# EAGLE board panelized (EAGLE 8.4.3)
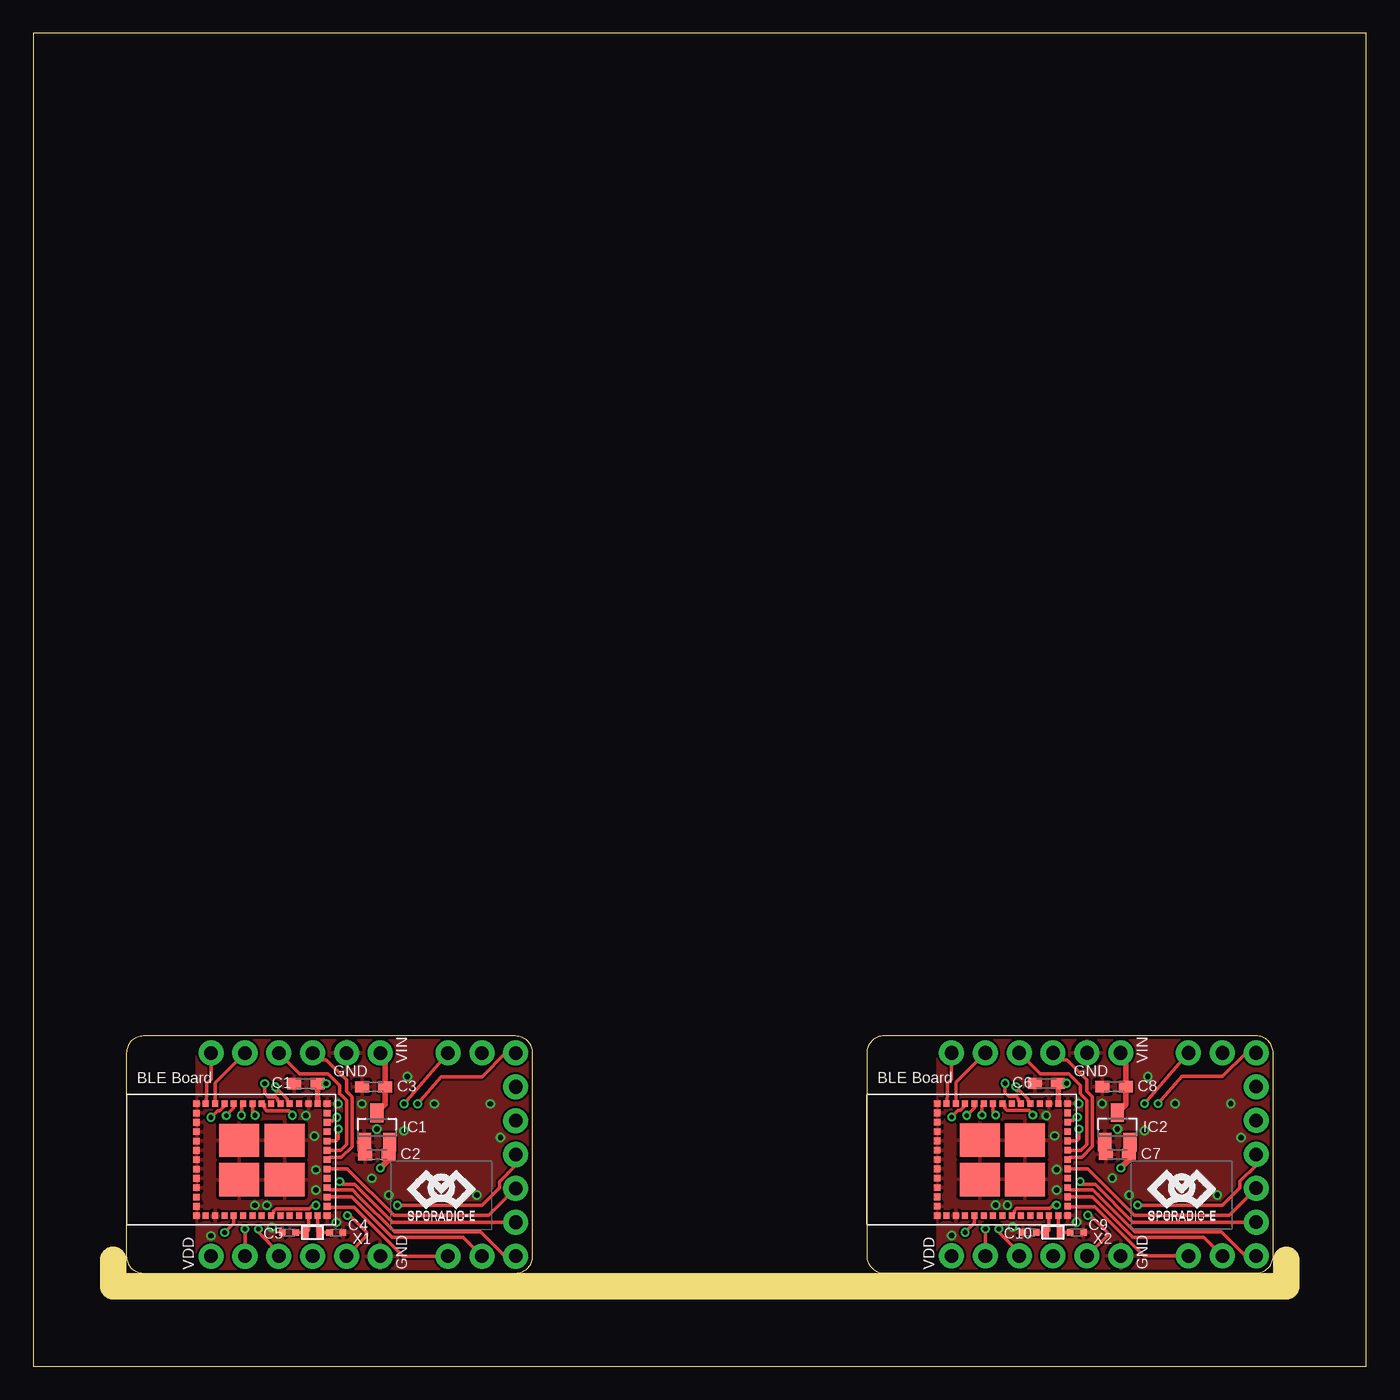
[diagram p0: board, top side]
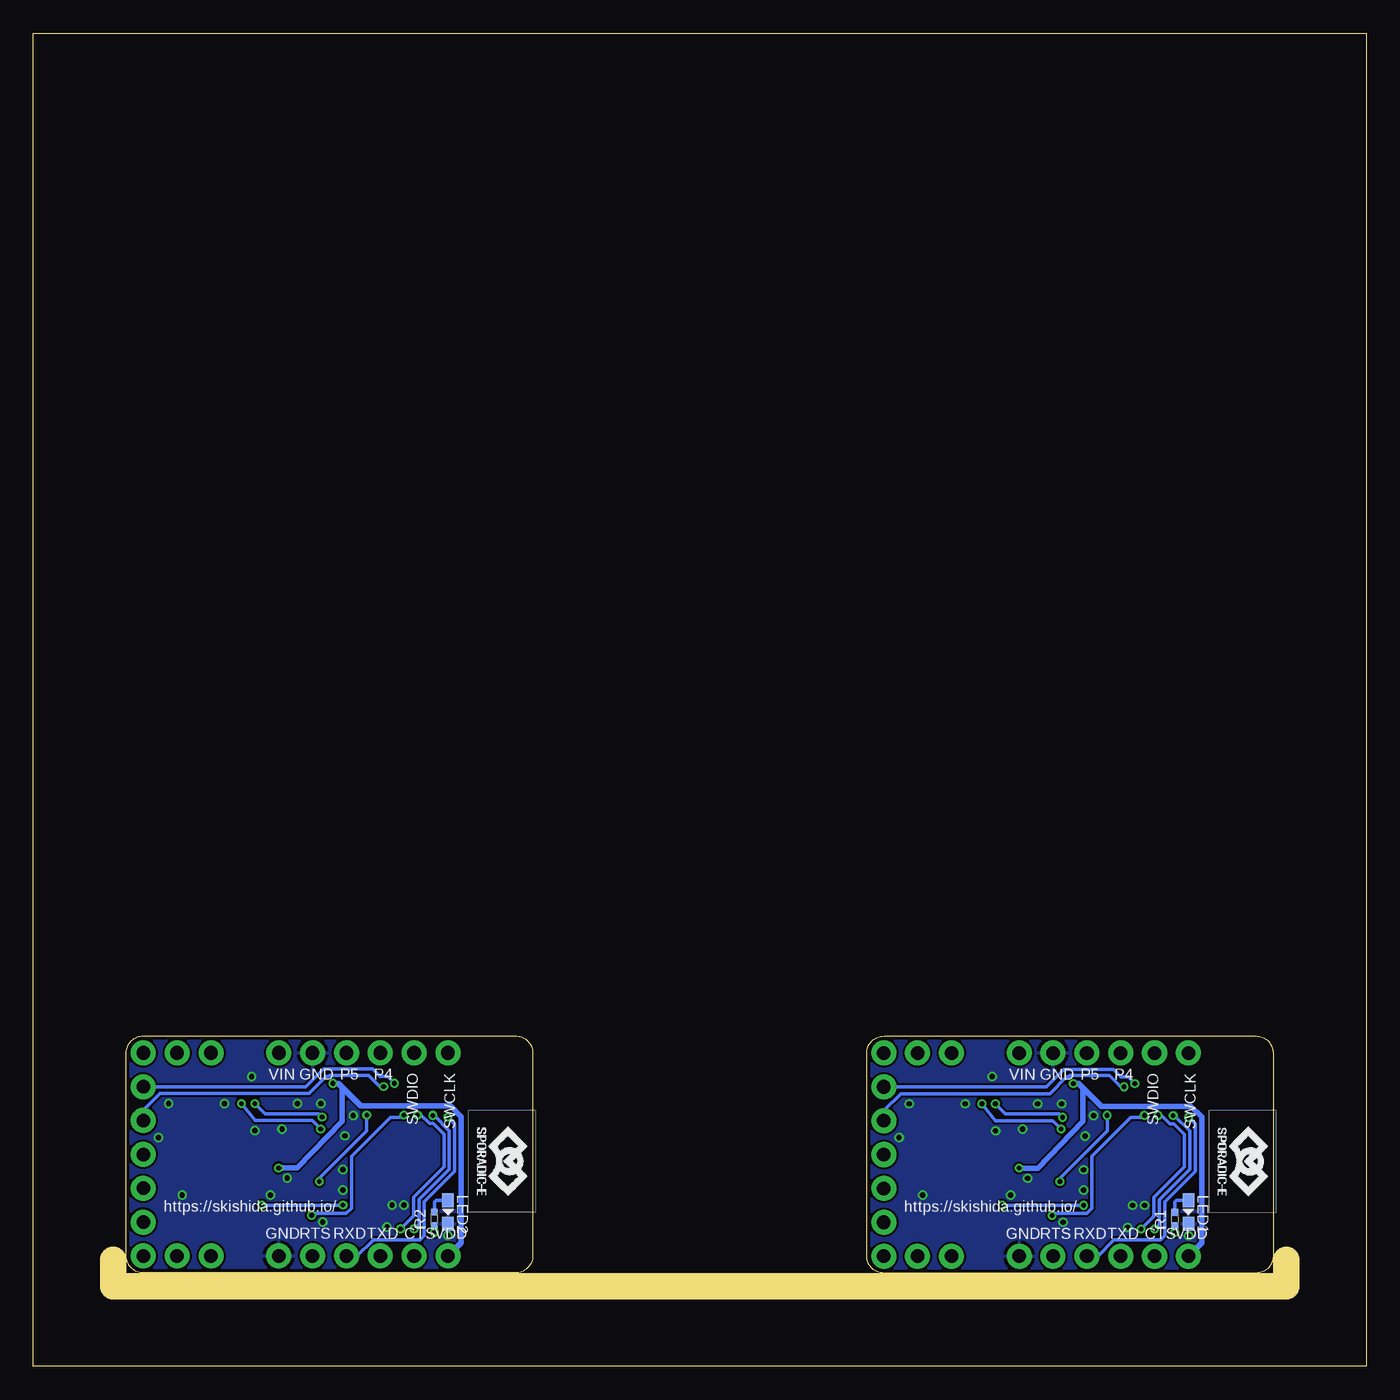
[diagram p1: board, bottom side, seen from below]

Size 100 x 100 mm. Coordinates in mm from the lower left corner, seen from the top.
Outline: 0,0 100,0 100,100 0,100 0,0
Outline: 36.2,24.77 8.26,24.77 arc90 6.99,23.5 6.99,8.26 arc90 8.26,6.99 36.2,6.99 arc90 37.47,8.26 37.47,23.5 arc90 36.2,24.77
Outline: 91.75,24.78 63.81,24.78 arc90 62.54,23.51 62.54,8.27 arc90 63.81,7 91.75,7 arc90 93.02,8.27 93.02,23.51 arc90 91.75,24.78
Copper layers (1*16): Top 0.035mm / dielectric 1.5mm / Bottom 0.035mm
Design rules "SeeedStudio_2layer_DRU_no_angle_20140221": minimum track width 6mil, minimum drill 12mil, track to track 6mil, track to pad 6mil, pad to pad 6mil, via to via 6mil, smd to smd 0mil, copper to edge 10mil, drill to drill 10mil, minimum pad ring 10mil, minimum via ring 6mil, stop-mask expansion 2mil, vias tented up to drill 25mil, thermal gap 10mil
Milling: 3 lines

## Footprints (pad centres in the part's own frame; a part is rotated, then mirrored left to right if it is on the bottom)
SMD1608_REDUCED = smd 1.05 x 0.85: 1 -0.875,0; 2 0.875,0
SMD1005 = smd 0.5 x 0.5: 1 -0.5,0; 2 0.5,0
SOT23 = smd 1 x 1.4: 1 -0.95,-1.1; 2 0.95,-1.1; 3 0,1.1
1X06_NO_SILK = drill 1.016 pad 1.88: 1 0,0; 2 2.54,0; 3 5.08,0; 4 7.62,0; 5 10.16,0; 6 12.7,0
1X03_NO_SILK = drill 1.016 pad 1.88: 1 0,0; 2 2.54,0; 3 5.08,0
1X05_NO_SILK = drill 1.016 pad 1.88: 1 0,0; 2 2.54,0; 3 5.08,0; 4 7.62,0; 5 10.16,0
LED1608_REDUCED = smd 1.05 x 0.85: A -0.875,0; K 0.875,0
MBH7BLZ02 = smd 0.5 x 0.5: P$1 -4.9,-4.2; P$15 4.9,-4.2; P$16 4.9,-3.5; P$17 4.9,-2.8; P$18 4.9,-2.1; P$19 4.9,-1.4; P$20 4.9,-0.7; P$21 4.9,0; P$22 4.9,0.7; P$23 4.9,1.4; P$24 4.9,2.1; P$25 4.9,2.8; P$26 4.9,3.5; P$27 4.9,4.2; P$41 -4.9,4.2; P$42 -4.9,3.5; P$43 -4.9,2.8; P$44 -4.9,2.1; P$45 -4.9,1.4; P$46 -4.9,0.7; P$47 -4.9,0; P$48 -4.9,-0.7; P$49 -4.9,-1.4; P$50 -4.9,-2.1; P$51 -4.9,-2.8; P$52 -4.9,-3.5 | smd 0.45 x 0.5: P$2 -4.2,-4.2; P$3 -3.5,-4.2; P$4 -2.8,-4.2; P$5 -2.1,-4.2; P$6 -1.4,-4.2; P$7 -0.7,-4.2; P$8 0,-4.2; P$9 0.7,-4.2; P$10 1.4,-4.2; P$11 2.1,-4.2; P$12 2.8,-4.2; P$13 3.5,-4.2; P$14 4.2,-4.2; P$28 4.2,4.2; P$29 3.5,4.2; P$30 2.8,4.2; P$31 2.1,4.2; P$32 1.4,4.2; P$33 0.7,4.2; P$34 0,4.2; P$35 -0.7,4.2; P$36 -1.4,4.2; P$37 -2.1,4.2; P$38 -2.8,4.2; P$39 -3.5,4.2; P$40 -4.2,4.2 | smd 3 x 2.5: P$53 -1.7,1.45; P$54 -1.7,-1.5; P$55 1.7,-1.5; P$56 1.7,1.45
SMD1610 = smd 0.5 x 1: 1 -0.55,-0.01; 2 0.55,-0.01

## Placement (x,y rotation side)
C1  1u  [SMD1608_REDUCED]  20.45,21.21 180 top
C2  [SMD1608_REDUCED]  25.78,15.88 180 top
C3  [SMD1608_REDUCED]  25.53,20.95 180 top
C4  [SMD1005]  22.73,10.03 0 top
C5  [SMD1005]  19.18,10.03 0 top
C6  1u  [SMD1608_REDUCED]  76,21.22 180 top
C7  [SMD1608_REDUCED]  81.34,15.89 180 top
C8  [SMD1608_REDUCED]  81.08,20.97 180 top
C9  [SMD1005]  78.29,10.05 0 top
C10  [SMD1005]  74.73,10.05 0 top
IC1  MCP1703CB  [SOT23]  25.78,17.91 0 top
IC2  MCP1703CB  [SOT23]  81.34,17.92 0 top
J1  [1X06_NO_SILK]  13.34,23.5 0 top
J2  [1X06_NO_SILK]  13.34,8.26 0 top
J3  [1X03_NO_SILK]  31.11,23.5 0 top
J4  [1X03_NO_SILK]  31.11,8.26 0 top
J5  [1X05_NO_SILK]  36.2,10.79 90 top
J6  [1X06_NO_SILK]  68.89,23.51 0 top
J7  [1X06_NO_SILK]  68.89,8.27 0 top
J8  [1X03_NO_SILK]  86.67,23.51 0 top
J9  [1X03_NO_SILK]  86.67,8.27 0 top
J10  [1X05_NO_SILK]  91.75,10.81 90 top
LED1  [LED1608_REDUCED]  13.34,11.56 270 bottom
LED2  [LED1608_REDUCED]  68.89,11.57 270 bottom
R1  [SMD1005]  14.35,11.05 270 bottom
R2  [SMD1005]  69.91,11.06 270 bottom
U$1  MBH7BLZ02  [MBH7BLZ02]  17.14,15.49 0 top
U$2  [LOGO-20MM]  30.61,12.83 0 top
U$3  [LOGO-20MM]  9.27,15.37 270 bottom
U$4  MBH7BLZ02  [MBH7BLZ02]  72.7,15.51 0 top
U$5  [LOGO-20MM]  86.16,12.84 0 top
U$6  [LOGO-20MM]  64.83,15.38 270 bottom
X1  ABS05-32.768KHZ-9-T  [SMD1610]  20.95,10.03 180 top
X2  ABS05-32.768KHZ-9-T  [SMD1610]  76.51,10.05 180 top

## Library data of the parts
C1-C10 LED1 LED2 R1 R2 = generic
IC1 IC2 = linear
J1 J2 J6 J7 = SparkFun-Connectors; PROD_ID: CONN-08437
J3-J5 J8-J10 = SparkFun-Connectors
U$1 U$4 = MBH7BLZ02
U$2 U$3 U$5 U$6 = logo
X1 X2 = SparkFun-Electromechanical

## Nets
CTS: J2.2 U$1.P$37
CTS1: J7.2 U$4.P$37
GND: C1.2 C2.2 C3.2 C4.2 C5.1 IC1.1 J1.5 J2.6 LED1.K U$1.P$1 U$1.P$3 U$1.P$15 U$1.P$27 U$1.P$29 U$1.P$41 U$1.P$42 U$1.P$43 U$1.P$44 U$1.P$45 U$1.P$46 U$1.P$47 U$1.P$48 U$1.P$49 U$1.P$50 U$1.P$52 U$1.P$53 U$1.P$54 U$1.P$55 U$1.P$56
GND1: C6.2 C7.2 C8.2 C9.2 C10.1 IC2.1 J6.5 J7.6 LED2.K U$4.P$1 U$4.P$3 U$4.P$15 U$4.P$27 U$4.P$29 U$4.P$41 U$4.P$42 U$4.P$43 U$4.P$44 U$4.P$45 U$4.P$46 U$4.P$47 U$4.P$48 U$4.P$49 U$4.P$50 U$4.P$52 U$4.P$53 U$4.P$54 U$4.P$55 U$4.P$56
IO0: U$1.P$26
IO1: J3.1 U$1.P$25
IO2: U$1.P$24
IO3: J3.3 U$1.P$23
IO4: U$4.P$26
IO5: J8.1 U$4.P$25
IO6: U$4.P$24
IO7: J8.3 U$4.P$23
N$1: LED1.A R1.1
N$2: R1.2 U$1.P$5
N$3: C9.1 U$4.P$14 X2.1
N$4: C10.2 U$4.P$13 X2.2
N$5: LED2.A R2.1
N$6: C4.1 U$1.P$14 X1.1
N$7: C5.2 U$1.P$13 X1.2
N$8: R2.2 U$4.P$5
P0.1: J6.3 U$4.P$22
P0.2: J6.4 U$4.P$21
P0.3: J10.1 U$4.P$34
P0.4: J1.3 U$1.P$22
P0.5: J1.4 U$1.P$21
P0.6: J5.2 U$1.P$20
P0.7: J5.1 U$1.P$34
P0.8: J10.2 U$4.P$20
P0.9: J10.3 U$4.P$9
P0.10: J10.4 U$4.P$31
P0.11: J10.5 U$4.P$32
P0.12: J9.1 U$4.P$16
P0.13: J9.2 U$4.P$17
P0.14: J9.3 U$4.P$18
P0.15: J5.3 U$1.P$9
P0.21: J4.1 U$1.P$16
P0.22: J4.2 U$1.P$17
P0.23: J4.3 U$1.P$18
P0.28: J5.5 U$1.P$32
P0.29: J5.4 U$1.P$31
RTS: J2.5 U$1.P$35
RTS1: J7.5 U$4.P$35
RXD: J2.4 U$1.P$38
RXD1: J7.4 U$4.P$38
SWCLK: J1.1 U$1.P$40
SWCLK1: J6.1 U$4.P$40
SWDIO: J1.2 U$1.P$39
SWDIO1: J6.2 U$4.P$39
TXD: J2.3 U$1.P$36
TXD1: J7.3 U$4.P$36
VDD: C1.1 C2.1 IC1.2 J2.1 U$1.P$28
VDD1: C6.1 C7.1 IC2.2 J7.1 U$4.P$28
VIN: C3.1 IC1.3 J1.6
VIN1: C8.1 IC2.3 J6.6

## Tracks (layer width: path | path; a pad name or v marks a point on that pad's centre or on a via)
CTS  (via drill 0.35)
  Top 0.254: v14.48,18.8 15.04,19.37 U$1.P$37 | J2.2 v15.88,10.29
  Bottom 0.254: v15.88,10.29 15.52,10.64 15.52,12.49 13.24,14.77 13.24,17.65 14.38,18.8 v14.48,18.8
CTS1  (via drill 0.35)
  Top 0.254: v70.03,18.81 70.6,19.38 U$4.P$37 | J7.2 v71.43,10.3
  Bottom 0.254: v71.43,10.3 71.07,10.66 71.07,12.5 68.79,14.78 68.79,17.67 69.94,18.81 v70.03,18.81
GND  (via drill 0.4 pad 0.4)
  other vias: 22.86,19.68 22.73,10.79 20.45,18.8 13.34,9.78 24.64,19.68 21.08,17.27 21.21,13.21 21.21,14.73 25.78,17.78 25.4,14.1 26.67,12.83 33.27,12.83 35.05,17.14 34.29,19.68 30.1,19.68 27.81,17.65 28.07,21.72 17.91,10.41 17.53,12.06 16.64,12.06
  pour Top: 12.06,24.77 12.06,6.99 37.47,6.99 37.47,24.77
  pour Bottom: 12.06,24.77 12.06,6.99 37.47,6.99 37.47,24.51 37.47,24.77
GND1  (via drill 0.4 pad 0.4)
  other vias: 78.42,19.7 78.29,10.81 76,18.81 68.89,9.79 80.19,19.7 76.64,17.29 76.76,13.22 76.76,14.74 81.34,17.79 80.95,14.11 82.22,12.84 88.83,12.84 90.61,17.16 89.84,19.7 85.65,19.7 83.37,17.67 83.62,21.73 73.46,10.43 73.08,12.08 72.19,12.08
  pour Top: 67.62,24.78 67.62,7 93.02,7 93.02,24.78
  pour Bottom: 67.62,24.78 67.62,7 93.02,7 93.02,24.52 93.02,24.78
IO1  (via drill 0.35)
  Top 0.254: U$1.P$25 22.17,18.41 22.48,18.41 22.73,18.67 v22.77,18.67 | v27.81,19.68 J3.1
  Bottom 0.254: v22.77,18.67 23.03,18.92 27.05,18.92 v27.81,19.68
IO3  (via drill 0.35)
  Top 0.254: U$1.P$23 22.73,16.89 22.89,17.04 v22.89,17.78 | v28.83,19.68 30.61,21.72 33.66,21.72 35.43,23.5 J3.3
  Bottom 0.254: v22.89,17.78 23.52,18.41 27.81,18.41 v28.83,19.68
IO5  (via drill 0.35)
  Top 0.254: U$4.P$25 77.72,18.43 78.03,18.43 78.29,18.68 v78.33,18.68 | v83.37,19.7 J8.1
  Bottom 0.254: v78.33,18.68 78.58,18.94 82.61,18.94 v83.37,19.7
IO7  (via drill 0.35)
  Top 0.254: U$4.P$23 78.29,16.9 78.44,17.06 v78.44,17.79 | v84.38,19.7 86.16,21.73 89.21,21.73 90.99,23.51 J8.3
  Bottom 0.254: v78.44,17.79 79.08,18.43 83.37,18.43 v84.38,19.7
N$1
  Bottom 0.254: LED1.A 14.24,12.43 14.35,12.32 R1.1
N$2  (via drill 0.35)
  Top 0.254: v14.35,10.03 15.04,10.73 U$1.P$5
  Bottom 0.254: R1.2 v14.35,10.03
N$3
  Top 0.254: U$4.P$14 76.9,10.22 arc90 X2.1 77.07,10.05 C9.1
N$4
  Top 0.254: U$4.P$13 76.2,10.3 arc-90 X2.2 75.24,10.06 C10.2
N$5
  Bottom 0.254: LED2.A 69.79,12.45 69.91,12.33 R2.1
N$6
  Top 0.254: U$1.P$14 21.34,10.2 arc90 X1.1 21.52,10.03 C4.1
N$7
  Top 0.254: U$1.P$13 20.64,10.28 arc-90 X1.2 19.69,10.04 C5.2
N$8  (via drill 0.35)
  Top 0.254: v69.91,10.05 70.6,10.74 U$4.P$5
  Bottom 0.254: R2.2 v69.91,10.05
P0.1
  Top 0.254: J6.3 75.55,21.93 77.68,21.93 78.54,21.06 78.54,20.46 78.67,20.33 78.68,20.33 79.05,19.96 79.05,16.65 78.61,16.21 U$4.P$22
P0.2
  Top 0.254: J6.4 77.02,23 77.53,23 79.05,21.48 79.05,20.62 79.46,20.22 79.46,16.48 78.65,15.68 77.77,15.68 U$4.P$21
P0.3  (via drill 0.35)
  Top 0.254: U$4.P$34 72.9,19.66 72.9,19.34 73.06,19.18 74.73,19.18 v74.99,18.83 | v78.54,13.86 78.75,13.64 79.66,13.64 82.5,10.81 J10.1
  Bottom 0.254: v74.99,18.83 74.99,17.67 78.54,14.11 v78.54,13.86
P0.4
  Top 0.254: J1.3 20,21.91 22.12,21.91 22.99,21.05 22.99,20.45 23.12,20.32 23.49,19.95 23.49,16.64 23.5,16.64 23.05,16.19 U$1.P$22
P0.5
  Top 0.254: J1.4 21.46,22.99 21.97,22.99 23.5,21.46 23.5,20.61 23.9,20.2 23.9,16.47 23.1,15.66 22.22,15.66 U$1.P$21
P0.6
  Top 0.254: U$1.P$20 23.56,14.79 27.05,11.3 34.16,11.3 J5.2
P0.7  (via drill 0.35)
  Top 0.254: U$1.P$34 17.34,19.64 17.34,19.33 17.5,19.16 19.18,19.16 v19.43,18.82 | v22.99,13.84 23.2,13.63 24.11,13.63 26.94,10.79 J5.1
  Bottom 0.254: v19.43,18.82 19.43,17.65 22.99,14.1 v22.99,13.84
P0.8
  Top 0.254: U$4.P$20 79.11,14.81 82.61,11.32 89.72,11.32 J10.2
P0.9  (via drill 0.35)
  Top 0.254: v82.86,12.08 89.21,12.08 90.53,13.4 90.53,13.85 91.75,15.07 J10.3 | U$4.P$9 73.6,11.5 73.6,11.67 73.76,11.84 76.26,11.84 76.5,12.08 v76.76,12.08
  Bottom 0.254: v76.76,12.08 v82.86,12.08
P0.10  (via drill 0.35)
  Top 0.254: U$4.P$31 74.6,19.9 74.6,20.07 74.03,20.64 73.79,20.64 73.72,20.71 v73.72,20.97
  Bottom 0.254: J10.4 91.75,19.19 90.48,20.46 79.3,20.46 78.03,21.73 77.88,21.73 77.78,21.83 74.83,21.83 73.97,20.97 v73.72,20.97
P0.11  (via drill 0.35)
  Top 0.254: U$4.P$32 73.9,19.9 73.9,20.07 73.74,20.24 73.18,20.24 72.91,20.5 v72.91,21.22
  Bottom 0.254: J10.5 79.56,20.97 78.24,22.29 74.53,22.29 73.97,21.73 73.42,21.73 v72.91,21.22
P0.12
  Top 0.254: J9.1 83.31,8.27 79.63,11.95 77.66,11.95 U$4.P$16
P0.13
  Top 0.254: U$4.P$17 79.45,12.71 82.48,9.67 87.81,9.67 J9.2
P0.14
  Top 0.254: J9.3 90.93,8.27 89.12,10.08 82.65,10.08 79.98,12.75 | 79.98,12.75 79.89,12.84 | U$4.P$18 77.77,13.24 79.5,13.24 79.98,12.75
P0.15  (via drill 0.35)
  Top 0.254: v27.3,12.06 33.66,12.06 34.98,13.39 34.98,13.84 36.2,15.06 J5.3 | U$1.P$9 18.04,11.49 18.04,11.66 18.2,11.82 20.7,11.82 20.94,12.06 v21.21,12.06
  Bottom 0.254: v21.21,12.06 v27.3,12.06
P0.21
  Top 0.254: J4.1 27.76,8.26 24.08,11.94 22.1,11.94 U$1.P$16
P0.22
  Top 0.254: U$1.P$17 23.89,12.69 26.93,9.66 32.25,9.66 J4.2
P0.23
  Top 0.254: J4.3 35.38,8.26 33.57,10.06 27.1,10.06 24.42,12.74 | 24.42,12.74 24.34,12.83 | U$1.P$18 22.22,13.22 23.94,13.22 24.42,12.74
P0.28  (via drill 0.35)
  Top 0.254: U$1.P$32 18.35,19.89 18.35,20.06 18.19,20.22 17.62,20.22 17.35,20.49 v17.35,21.21
  Bottom 0.254: J5.5 24,20.95 22.68,22.28 18.97,22.28 18.41,21.72 17.86,21.72 v17.35,21.21
P0.29  (via drill 0.35)
  Top 0.254: U$1.P$31 19.05,19.89 19.05,20.06 18.48,20.63 18.23,20.63 18.16,20.7 v18.16,20.95
  Bottom 0.254: J5.4 36.2,19.18 34.92,20.45 23.75,20.45 22.48,21.72 22.32,21.72 22.22,21.82 19.28,21.82 18.41,20.95 v18.16,20.95
RTS  (via drill 0.35)
  Top 0.254: J2.5 25.02,9.78 25.02,10.03 23.75,11.3 v23.57,11.3 | v16.64,18.82 16.45,19.01 U$1.P$35
  Bottom 0.254: v23.57,11.3 23.41,11.46 20.96,11.46 20.58,11.84 20.58,15.74 17.65,18.67 16.89,18.67 16.74,18.82 v16.64,18.82
RTS1  (via drill 0.35)
  Top 0.254: J7.5 80.57,9.79 80.57,10.05 79.3,11.32 v79.12,11.32 | v72.19,18.83 72,19.03 U$4.P$35
  Bottom 0.254: v79.12,11.32 78.97,11.47 76.51,11.47 76.13,11.85 76.13,15.76 73.21,18.68 72.45,18.68 72.29,18.83 v72.19,18.83
RXD  (via drill 0.35)
  Top 0.254: v13.34,18.67 13.83,19.16 13.99,19.16 14.35,19.52 U$1.P$38
  Bottom 0.254: 20.19,8.26 20.14,8.26 | 20.19,8.26 J2.4 | v13.34,18.67 12.83,18.16 12.83,14.6 15.11,12.32 15.11,9.78 15.42,9.47 18.92,9.47 20.14,8.26 | 20.14,8.26 20.19,8.26
RXD1  (via drill 0.35)
  Top 0.254: v68.89,18.68 69.39,19.18 69.54,19.18 69.9,19.54 U$4.P$38
  Bottom 0.254: 75.75,8.27 75.69,8.27 | 75.75,8.27 J7.4 | v68.89,18.68 68.39,18.18 68.39,14.61 70.67,12.33 70.67,9.79 70.97,9.49 74.47,9.49 75.69,8.27 | 75.69,8.27 75.75,8.27
SWCLK
  Top 0.254: U$1.P$40 13.01,20.27 13.01,21.2 13.34,21.52 J1.1
SWCLK1
  Top 0.254: U$4.P$40 68.57,20.28 68.57,21.22 68.89,21.54 J6.1
SWDIO
  Top 0.254: U$1.P$39 13.64,21.26 13.74,21.36 J1.2
SWDIO1
  Top 0.254: U$4.P$39 69.2,21.27 69.3,21.37 J6.2
TXD  (via drill 0.35)
  Top 0.254: J2.3 18.41,8.51 16.89,10.03 v16.89,10.29 | v15.62,18.82 15.62,19.57 U$1.P$36
  Bottom 0.254: v16.89,10.29 15.93,11.25 15.93,12.66 13.64,14.94 13.64,17.4 14.44,18.19 14.73,18.19 15.36,18.82 v15.62,18.82
TXD1  (via drill 0.35)
  Top 0.254: J7.3 73.97,8.52 72.45,10.05 v72.45,10.3 | v71.18,18.83 71.18,19.58 U$4.P$36
  Bottom 0.254: v72.45,10.3 71.48,11.27 71.48,12.67 69.2,14.95 69.2,17.41 69.99,18.2 70.28,18.2 70.91,18.83 v71.18,18.83
VDD  (via drill 0.35)
  Top 0.406: v21.97,21.21 C1.1 arc-90 21.34,21.19 U$1.P$28 | IC1.2 26.73,15.95 C2.1 26.66,15.48 v26.04,14.86
  Bottom 0.406: J2.1 12.35,9.24 12.35,18.7 13.15,19.5 19.89,19.5 21.27,20.89 | 21.27,20.89 21.59,21.21 v21.97,21.21 | v26.04,14.86 24.64,14.86 21.27,18.35 21.27,20.89
VDD1  (via drill 0.35)
  Top 0.406: v77.53,21.22 C6.1 arc-90 76.9,21.2 U$4.P$28 | IC2.2 82.29,15.96 C7.1 82.21,15.49 v81.59,14.87
  Bottom 0.406: J7.1 67.9,9.26 67.9,18.71 68.71,19.52 75.44,19.52 76.83,20.9 | 76.83,20.9 77.14,21.22 v77.53,21.22 | v81.59,14.87 80.19,14.87 76.83,18.36 76.83,20.9
VIN
  Top 0.406: J1.6 26.4,23.13 C3.1 26.4,19.63 IC1.3
VIN1
  Top 0.406: J6.6 81.96,23.14 C8.1 81.96,19.64 IC2.3

## Text on the board
tPlace: VIN | VIN | GND | GND | BLE Board | BLE Board | VDD | GND | VDD | GND
bPlace: SWCLK | SWDIO | SWCLK | SWDIO | P4 | P5 | GND | VIN | P4 | P5 | GND | VIN | https://skishida.github.io/ | https://skishida.github.io/ | VDD | CTS | TXD | RXD | RTS | GND | VDD | CTS | TXD | RXD | RTS | GND